# Altium PCB CHILD_BOARD_revA.PcbDoc (part 1 of 3)
Units mil, origin at the board's own origin, x right, y up, seen from the top; angles counter-clockwise.
Board outline 6000 x 4000 mil, 2 copper layers (Top Layer, Bottom Layer); 312 components, 224 nets, 1180 pads, 0 vias.
Unrouted connection lines stored in the file: 721.
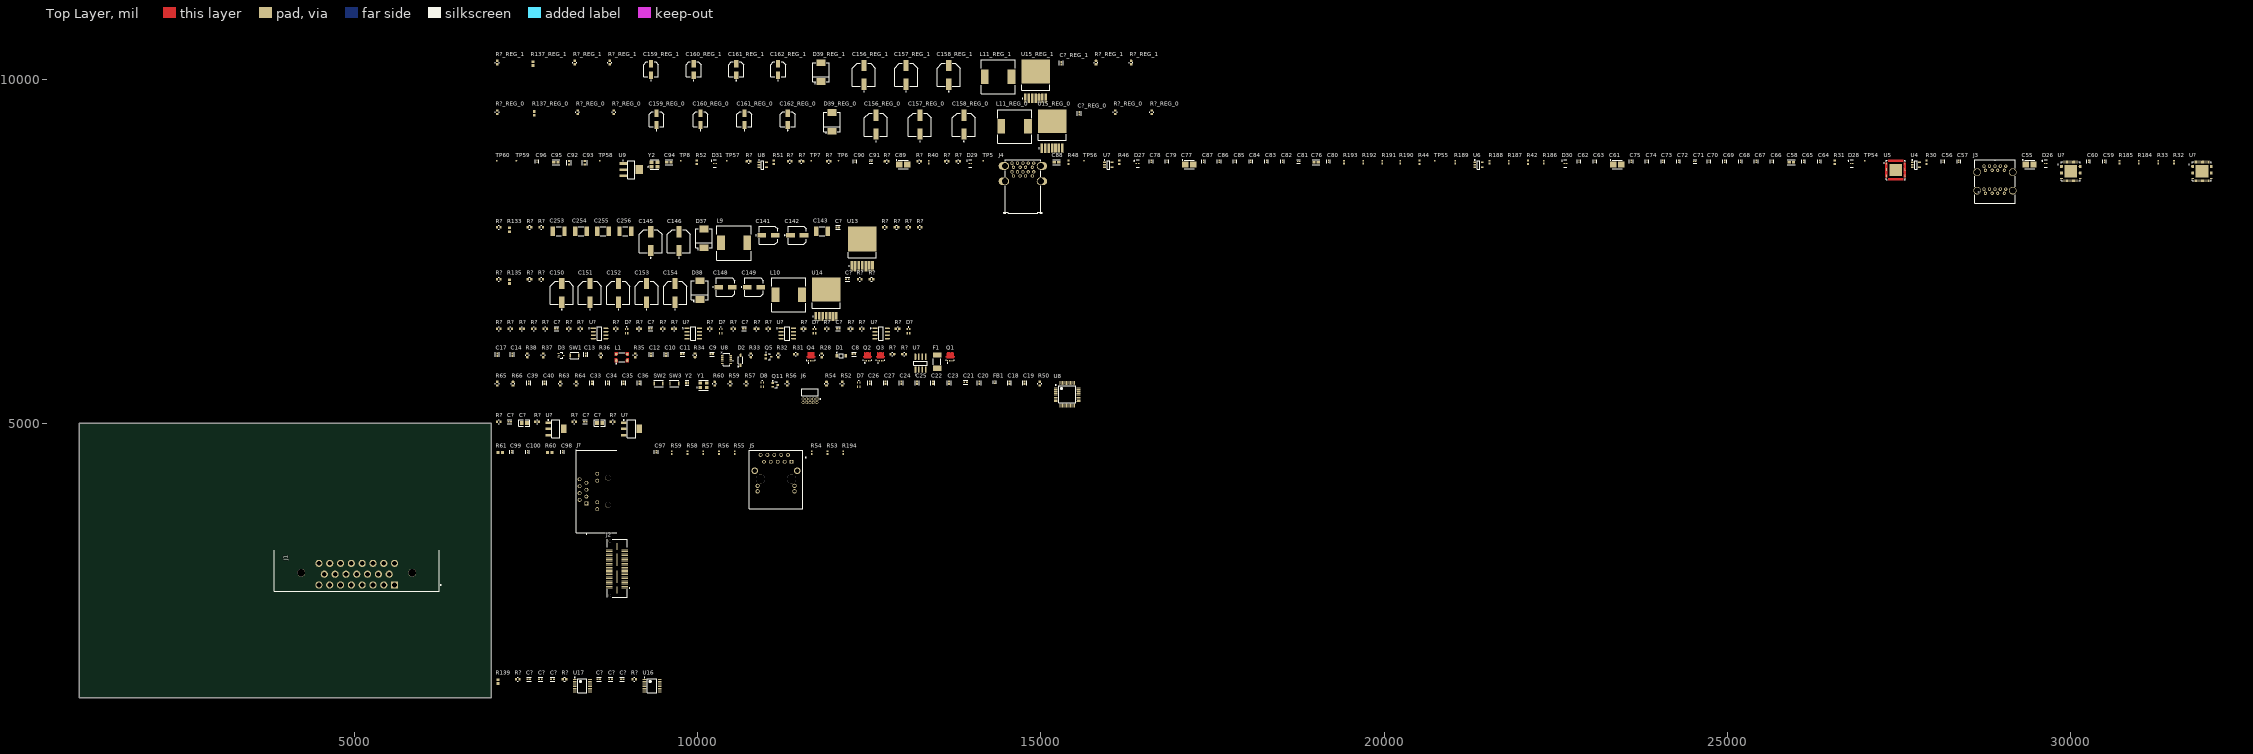
[diagram p0: Top Layer view]
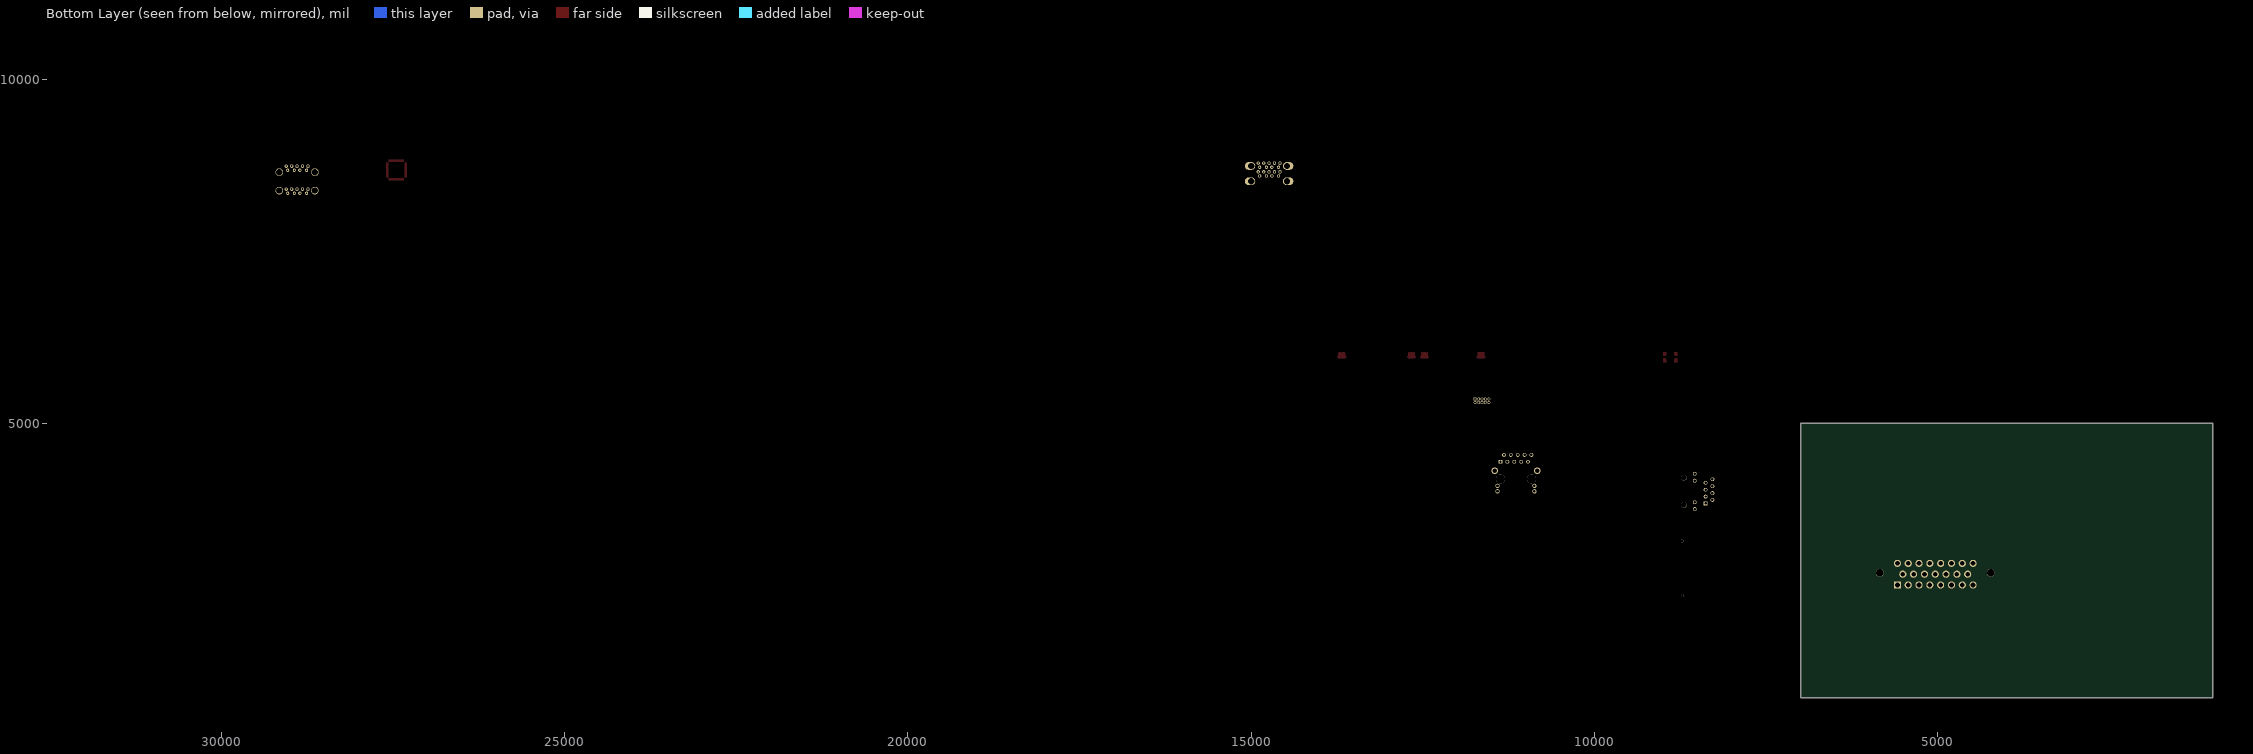
[diagram p1: Bottom Layer view, seen from below]

## Layer stack, top to bottom
Top Solder: solder mask 0.4, Solder Resist, Dk 3.5
Top Layer: signal copper 1.4
Dielectric 1: dielectric 12.6, FR-4, Dk 4.8
Bottom Layer: signal copper 1.4
Bottom Solder: solder mask 0.4, Solder Resist, Dk 3.5

## Board outline
1000,1000 7000,1000 7000,5000 1000,5000

## Design rules (kind name [scope] priority, off if disabled: settings)
Clearance [All] p1: gap=10 ignorepadtopadclearanceinfootprint=FALSE
DiffPairsRouting [All] p1: maxlimit=10 minlimit=10 mostfreqgap=10 toplayer_minwidth=15 toplayer_maxwidth=15 toplayer_prefwidth=15 bottomlayer_minwidth=15 bottomlayer_maxwidth=15 bottomlayer_prefwidth=15 maxuncoupledlength=500
PolygonConnect [All] p1: connectstyle=Relief reliefconductorwidth=10 reliefentries=4 polygonreliefangle="90 Angle" airgapwidth=10
RoutingVias [All] p1: holewidth=28 width=50 viastyle="Through Hole" minholewidth=28 minwidth=50 maxholewidth=28 maxwidth=50
SolderMaskExpansion [All] p1: expansion=4 istentingtop=FALSE
Width [All] p1: maxlimit=10 minlimit=10 preferedwidth=10
29 further rules are at their usual default settings.

## Classes and differential pairs
differential pair class 90DIFF: PRE_USB0_RX PRE_USB0_TX PRE_USB1_RX PRE_USB1_TX PRE_USB2_RX PRE_USB2_TX PRE_USB3_RX PRE_USB3_TX USB0_RX USB0_TX USB1_RX USB1_TX USB2_RX USB2_TX USB2UP USB3_RX USB3_TX USB3UP_RX USB3UP_TX USBH0_D USBH1_D USBH2_D USBH3_D
channel class 5V_REG: REG_0 REG_1
net class PWR: 2V_AUX_OUT 2V_AUX_VCC 3V3_AUX_FB 3V3_AUX_VCC 5V_MAIN_VCC 5V_REG_FB_REG_0 5V_REG_FB_REG_1 INT_VCC NetC?_2 NetC?_REG_0_2 NetC?_REG_1_2
net class 120DIFF: CAN_N CAN_P PRE_CAN_N PRE_CAN_P TERM_CAP
net class 100DIFF: GBE_MDI0_N GBE_MDI0_P GBE_MDI1_N GBE_MDI1_P GBE_MDI2_N GBE_MDI2_P GBE_MDI3_N GBE_MDI3_P
net class 90DIFF: PRE_USB0_RX_N PRE_USB0_RX_P PRE_USB0_TX_N PRE_USB0_TX_P PRE_USB1_RX_N PRE_USB1_RX_P PRE_USB1_TX_N PRE_USB1_TX_P PRE_USB2_RX_N PRE_USB2_RX_P PRE_USB2_TX_N PRE_USB2_TX_P PRE_USB3_RX_N PRE_USB3_RX_P PRE_USB3_TX_N PRE_USB3_TX_P USB0_RX_N USB0_RX_P USB0_TX_N USB0_TX_P USB1_RX_N USB1_RX_P USB1_TX_N USB1_TX_P USB2_RX_N USB2_RX_P USB2_TX_N USB2_TX_P USB2UP_N USB2UP_P USB3_RX_N USB3_RX_P USB3_TX_N USB3_TX_P USB3UP_RX_N USB3UP_RX_P USB3UP_TX_N USB3UP_TX_P USBH0_D_N USBH0_D_P USBH1_D_N USBH1_D_P USBH2_D_N USBH2_D_P USBH3_D_N USBH3_D_P
component class USB3_0: C55 C56 C57 C58 C59 C60 C61 C62 C63 C64 C65 C66 C67 C68 C69 C70 C71 C72 C73 C74 C75 C76 C77 C78 C79 C80 C81 C82 C83 C84 C85 C86 C87 C88 C89 C90 C91 C92 C93 C94 C95 C96 D26 D27 D28 D29 D30 D31 J3 J4 R30 R31 R32 R33 R40 R42 R44 R46 R48 R51 R52 R184 R185 R186 R187 R188 R189 R190 R191 R192 R193 R? TP5 TP6 TP7 TP8 TP54 TP55 TP56 TP57 TP58 TP59 TP60 U4 U5 U6 U7 U8 U9 U? Y2
component class REG_3: C141 C142 C143 C145 C146 C253 C254 C255 C256 C? D37 L9 R133 R? U13
component class REG_2: C148 C149 C150 C151 C152 C153 C154 C? D38 L10 R135 R? U14
component class REG_1: C156_REG_1 C157_REG_1 C158_REG_1 C159_REG_1 C160_REG_1 C161_REG_1 C162_REG_1 C?_REG_1 D39_REG_1 L11_REG_1 R137_REG_1 R?_REG_1 U15_REG_1
component class REG_0: C156_REG_0 C157_REG_0 C158_REG_0 C159_REG_0 C160_REG_0 C161_REG_0 C162_REG_0 C?_REG_0 D39_REG_0 L11_REG_0 R137_REG_0 R?_REG_0 U15_REG_0
component class PWR_MGMT: C8 C9 C10 C11 C12 C13 C14 C17 D1 D2 D3 F1 L1 Q1 Q2 Q3 Q4 Q5 R28 R31 R32 R33 R34 R35 R36 R37 R38 R? SW1 U7 U8
component class INT_REG_0: C? R? U?
component class MCU_0: C18 C19 C20 C21 C22 C23 C24 C25 C26 C27 C33 C34 C35 C36 C39 C40 D7 D8 FB1 J6 Q11 R50 R52 R54 R56 R57 R59 R60 R63 R64 R65 R66 SW2 SW3 U8 Y1 Y2
component class PWR_MGMT_0: C? D? R? U?
component class ETH_IF_0: C97 C98 C99 C100 J5 J? R53 R54 R55 R56 R57 R58 R59 R60 R61 R194
component class CHILD_BOARD: J1 J2
component class ADC_0: C? R139 R? U16 U17
differential pair X: +X_P -X_N
differential pair X32: +X32_P -X32_N
differential pair X25: +X25_P -X25_N
differential pair USBH3_D: +USBH3_D_P -USBH3_D_N
differential pair USBH2_D: +USBH2_D_P -USBH2_D_N
differential pair USBH1_D: +USBH1_D_P -USBH1_D_N
differential pair USBH0_D: +USBH0_D_P -USBH0_D_N
differential pair USB3UP_TX: +USB3UP_TX_P -USB3UP_TX_N
differential pair USB3UP_RX: +USB3UP_RX_P -USB3UP_RX_N
differential pair USB3_TX: +USB3_TX_P -USB3_TX_N
differential pair USB3_RX: +USB3_RX_P -USB3_RX_N
differential pair USB2UP: +USB2UP_P -USB2UP_N
differential pair USB2_TX: +USB2_TX_P -USB2_TX_N
differential pair USB2_RX: +USB2_RX_P -USB2_RX_N
differential pair USB1_TX: +USB1_TX_P -USB1_TX_N
differential pair USB1_RX: +USB1_RX_P -USB1_RX_N
differential pair USB0_TX: +USB0_TX_P -USB0_TX_N
differential pair USB0_RX: +USB0_RX_P -USB0_RX_N
differential pair PRE_USB3_TX: +PRE_USB3_TX_P -PRE_USB3_TX_N
differential pair PRE_USB3_RX: +PRE_USB3_RX_P -PRE_USB3_RX_N
differential pair PRE_USB2_TX: +PRE_USB2_TX_P -PRE_USB2_TX_N
differential pair PRE_USB2_RX: +PRE_USB2_RX_P -PRE_USB2_RX_N
differential pair PRE_USB1_TX: +PRE_USB1_TX_P -PRE_USB1_TX_N
differential pair PRE_USB1_RX: +PRE_USB1_RX_P -PRE_USB1_RX_N
differential pair PRE_USB0_TX: +PRE_USB0_TX_P -PRE_USB0_TX_N
differential pair PRE_USB0_RX: +PRE_USB0_RX_P -PRE_USB0_RX_N
differential pair PRE_CAN: +PRE_CAN_P -PRE_CAN_N
differential pair GBE_MDI3: +GBE_MDI3_P -GBE_MDI3_N
differential pair GBE_MDI2: +GBE_MDI2_P -GBE_MDI2_N
differential pair GBE_MDI1: +GBE_MDI1_P -GBE_MDI1_N
differential pair GBE_MDI0: +GBE_MDI0_P -GBE_MDI0_N

## Components (designator, comment, footprint, x,y, rotation, side; value= is the part's Value field where it differs from the comment)
C8 "100n" FP-0402-L_1_0_0_05-W_0_5-IPC_A 12280,6005 r0 top
C9 "100n" FP-0402-L_1_0_0_05-W_0_5-IPC_A 10210,6005 r0 top
C10 "100n" FP-0402-L_1_0_0_05-W_0_5-IPC_A 9545,5995 r90 top
C11 "100n" FP-0402-L_1_0_0_05-W_0_5-IPC_A 9780,6005 r0 top
C12 "6.6p" FP-0402-L_1_0_0_05-W_0_5-IPC_A 9325,5995 r90 top
C13 "100n" FP-0402-L_1_0_0_05-W_0_5-IPC_A 8375,5995 r90 top
C14 "6.6p" FP-0402-L_1_0_0_05-W_0_5-IPC_A 7305,5995 r90 top
C17 "100n" FP-0402-L_1_0_0_05-W_0_5-IPC_A 7085,5995 r90 top
C18 "4.7u" FP-0402-L_1_0_0_05-W_0_5-IPC_A 14545,5585 r90 top
C19 "100n" FP-0402-L_1_0_0_05-W_0_5-IPC_A 14765,5585 r90 top
C20 "100n" FP-0402-L_1_0_0_05-W_0_5-IPC_A 14105,5585 r90 top
C21 "100n" FP-0402-L_1_0_0_05-W_0_5-IPC_A 13905,5595 r0 top
C22 "1u" FP-0402-L_1_0_0_05-W_0_5-IPC_A 13430,5585 r90 top
C23 "100n" FP-0402-L_1_0_0_05-W_0_5-IPC_A 13665,5585 r90 top
C24 "1u" FP-0402-L_1_0_0_05-W_0_5-IPC_A 12970,5585 r90 top
C25 "100n" FP-0402-L_1_0_0_05-W_0_5-IPC_A 13200,5585 r90 top
C26 "1u" FP-0402-L_1_0_0_05-W_0_5-IPC_A 12510,5585 r90 top
C27 "100n" FP-0402-L_1_0_0_05-W_0_5-IPC_A 12740,5585 r90 top
C33 "6.8p" FP-0402-L_1_0_0_05-W_0_5-IPC_A 8465,5585 r90 top
C34 "6.8p" FP-0402-L_1_0_0_05-W_0_5-IPC_A 8695,5585 r90 top
C35 "18p" FP-0402-L_1_0_0_05-W_0_5-IPC_A 8925,5585 r90 top
C36 "18p" FP-0402-L_1_0_0_05-W_0_5-IPC_A 9155,5585 r90 top
C39 "100n" FP-0402-L_1_0_0_05-W_0_5-IPC_A 7545,5585 r90 top
C40 "100n" FP-0402-L_1_0_0_05-W_0_5-IPC_A 7775,5585 r90 top
C55 "T520B337M2R5ATE045" KEMT-520-B-2_M 29400,8765 r0 top
C56 "C1005X7R1H104K050BB" FP-C1005-050-0_05-IPC_C 28140,8810 r90 top
C57 "C1005X7R1H104K050BB" FP-C1005-050-0_05-IPC_C 28370,8810 r90 top
C58 "GRM188R60J106ME47D" FP-GRM188-0_1-e0_2_0_55-IPC_A 25930,8800 r0 top
C59 "C1005X7R1H104K050BB" FP-C1005-050-0_05-IPC_C 30490,8810 r90 top
C60 "C1005X7R1H104K050BB" FP-C1005-050-0_05-IPC_C 30260,8810 r90 top
C61 "T520B337M2R5ATE045" KEMT-520-B-2_M 23395,8765 r0 top
C62 "C1005X7R1H104K050BB" FP-C1005-050-0_05-IPC_C 22840,8810 r90 top
C63 "C1005X7R1H104K050BB" FP-C1005-050-0_05-IPC_C 23070,8810 r90 top
C64 "C1005X7R1H104K050BB" FP-C1005-050-0_05-IPC_C 26340,8810 r90 top
C65 "C1005X7R1H104K050BB" FP-C1005-050-0_05-IPC_C 26110,8810 r90 top
C66 "C1005X7R1H104K050BB" FP-C1005-050-0_05-IPC_C 25650,8810 r90 top
C67 "C1005X7R1H104K050BB" FP-C1005-050-0_05-IPC_C 25420,8810 r90 top
C68 "C1005X7R1H104K050BB" FP-C1005-050-0_05-IPC_C 25190,8810 r90 top
C69 "C1005X7R1H104K050BB" FP-C1005-050-0_05-IPC_C 24960,8810 r90 top
C70 "C1005X7R1H104K050BB" FP-C1005-050-0_05-IPC_C 24730,8810 r90 top
C71 "C1005X7R1H104K050BB" FP-C1005-050-0_05-IPC_C 24525,8810 r0 top
C72 "C1005X7R1H104K050BB" FP-C1005-050-0_05-IPC_C 24290,8810 r90 top
C73 "C1005X7R1H104K050BB" FP-C1005-050-0_05-IPC_C 24060,8810 r90 top
C74 "C1005X7R1H104K050BB" FP-C1005-050-0_05-IPC_C 23830,8810 r90 top
C75 "C1005X7R1H104K050BB" FP-C1005-050-0_05-IPC_C 23600,8810 r90 top
C76 "GRM188R60J106ME47D" FP-GRM188-0_1-e0_2_0_55-IPC_A 19010,8800 r0 top
C77 "T520B337M2R5ATE045" KEMT-520-B-2_M 17165,8765 r0 top
C78 "C1005X7R1H104K050BB" FP-C1005-050-0_05-IPC_C 16610,8810 r90 top
C79 "C1005X7R1H104K050BB" FP-C1005-050-0_05-IPC_C 16840,8810 r90 top
C80 "C1005X7R1H104K050BB" FP-C1005-050-0_05-IPC_C 19190,8810 r90 top
C81 "C1005X7R1H104K050BB" FP-C1005-050-0_05-IPC_C 18755,8810 r0 top
C82 "C1005X7R1H104K050BB" FP-C1005-050-0_05-IPC_C 18520,8810 r90 top
C83 "C1005X7R1H104K050BB" FP-C1005-050-0_05-IPC_C 18290,8810 r90 top
C84 "C1005X7R1H104K050BB" FP-C1005-050-0_05-IPC_C 18060,8810 r90 top
C85 "C1005X7R1H104K050BB" FP-C1005-050-0_05-IPC_C 17830,8810 r90 top
C86 "C1005X7R1H104K050BB" FP-C1005-050-0_05-IPC_C 17600,8810 r90 top
C87 "C1005X7R1H104K050BB" FP-C1005-050-0_05-IPC_C 17370,8810 r90 top
C88 "GRM188R60J106ME47D" FP-GRM188-0_1-e0_2_0_55-IPC_A 15230,8800 r0 top
C89 "T520B337M2R5ATE045" KEMT-520-B-2_M 13000,8765 r0 top
C90 "C1005X7R1H104K050BB" FP-C1005-050-0_05-IPC_C 12295,8810 r90 top
C91 "C1005X7R1H104K050BB" FP-C1005-050-0_05-IPC_C 12525,8810 r0 top
C92 "C0603C300J5GACTU" FP-C0603C-CF-MFG 8130,8790 r90 top value="30 pF"
C93 "C0603C300J5GACTU" FP-C0603C-CF-MFG 8360,8790 r90 top value="30 pF"
C94 "GRM188R60J106ME47D" FP-GRM188-0_1-e0_2_0_55-IPC_A 9585,8800 r0 top
C95 "GRM188R60J106ME47D" FP-GRM188-0_1-e0_2_0_55-IPC_A 7940,8800 r0 top
C96 "C1005X7R1H104K050BB" FP-C1005-050-0_05-IPC_C 7665,8810 r90 top
C97 "C1005X7R1H104K050BB" FP-C1005-050-0_05-IPC_C 9400,4580 r90 top
C98 "C1005X7R1H104K050BB" FP-C1005-050-0_05-IPC_C 8035,4580 r90 top
C99 "C1005X7R1H104K050BB" FP-C1005-050-0_05-IPC_C 7295,4580 r90 top
C100 "C1005X7R1H104K050BB" FP-C1005-050-0_05-IPC_C 7525,4580 r90 top
C141 "EEHZA1V680XP" FP-EEH-D8-MFG 11035,7735 r0 top
C142 "EEHZA1V680XP" FP-EEH-D8-MFG 11455,7735 r0 top
C143 "CAP 470nF 50V 1812(4532)" CAPC1812(4532)125_M 11815,7795 r0 top value=470nF
C145 "16SVPC120M" FP-OS-CON-SMT-E7-MFG 9320,7650 r90 top
C146 "16SVPC120M" FP-OS-CON-SMT-E7-MFG 9730,7650 r90 top
C148 "EEHZA1V680XP" FP-EEH-D8-MFG 10410,6980 r0 top
C149 "EEHZA1V680XP" FP-EEH-D8-MFG 10825,6980 r0 top
C150 "16SVPC120M" FP-OS-CON-SMT-E7-MFG 8025,6895 r90 top
C151 "16SVPC120M" FP-OS-CON-SMT-E7-MFG 8435,6895 r90 top
C152 "16SVPC120M" FP-OS-CON-SMT-E7-MFG 8850,6895 r90 top
C153 "16SVPC120M" FP-OS-CON-SMT-E7-MFG 9260,6895 r90 top
C154 "16SVPC120M" FP-OS-CON-SMT-E7-MFG 9675,6895 r90 top
C156_REG_0 "20SVP33M" FP-OS-CON-SMT-E7-MFG 12600,9345 r90 top (schematic designator C156)
C156_REG_1 "20SVP33M" FP-OS-CON-SMT-E7-MFG 12425,10070 r90 top (schematic designator C156)
C157_REG_0 "20SVP33M" FP-OS-CON-SMT-E7-MFG 13240,9345 r90 top (schematic designator C157)
C157_REG_1 "20SVP33M" FP-OS-CON-SMT-E7-MFG 13040,10070 r90 top (schematic designator C157)
C158_REG_0 "20SVP33M" FP-OS-CON-SMT-E7-MFG 13880,9345 r90 top (schematic designator C158)
C158_REG_1 "20SVP33M" FP-OS-CON-SMT-E7-MFG 13660,10070 r90 top (schematic designator C158)
C159_REG_0 "EEE-1AA101WR" FP-SC-MFG 9405,9425 r90 top (schematic designator C159)
C159_REG_1 "EEE-1AA101WR" FP-SC-MFG 9325,10150 r90 top (schematic designator C159)
C160_REG_0 "EEE-1AA101WR" FP-SC-MFG 10045,9425 r90 top (schematic designator C160)
C160_REG_1 "EEE-1AA101WR" FP-SC-MFG 9945,10150 r90 top (schematic designator C160)
C161_REG_0 "EEE-1AA101WR" FP-SC-MFG 10685,9425 r90 top (schematic designator C161)
C161_REG_1 "EEE-1AA101WR" FP-SC-MFG 10565,10150 r90 top (schematic designator C161)
C162_REG_0 "EEE-1AA101WR" FP-SC-MFG 11315,9425 r90 top (schematic designator C162)
C162_REG_1 "EEE-1AA101WR" FP-SC-MFG 11175,10150 r90 top (schematic designator C162)
C253 "CAP 470nF 50V 1812(4532)" CAPC1812(4532)125_M 7980,7795 r0 top value=470nF
C254 "CAP 470nF 50V 1812(4532)" CAPC1812(4532)125_M 8305,7795 r0 top value=470nF
C255 "CAP 470nF 50V 1812(4532)" CAPC1812(4532)125_M 8625,7795 r0 top value=470nF
C256 "CAP 470nF 50V 1812(4532)" CAPC1812(4532)125_M 8950,7795 r0 top value=470nF
C? "100n" FP-0402-L_1_0_0_05-W_0_5-IPC_A 7545,1270 r0 top
C? "100n" FP-0402-L_1_0_0_05-W_0_5-IPC_A 8565,1270 r0 top
C? "100n" FP-0402-L_1_0_0_05-W_0_5-IPC_A 8365,5020 r0 top
C? "100n" FP-0402-L_1_0_0_05-W_0_5-IPC_A 8905,1270 r0 top
C? "100n" FP-0402-L_1_0_0_05-W_0_5-IPC_A 7715,1270 r0 top
C? "10n" FP-0402-L_1_0_0_05-W_0_5-IPC_A 12185,7095 r0 top
C? "100n" FP-0402-L_1_0_0_05-W_0_5-IPC_A 7890,1270 r0 top
C? "100n" FP-0402-L_1_0_0_05-W_0_5-IPC_A 8735,1270 r0 top
C? "100n" FP-0402-L_1_0_0_05-W_0_5-IPC_A 7265,5020 r0 top
C? "100n" FP-0402-L_1_0_0_05-W_0_5-IPC_A 7945,6375 r0 top
C? "100n" FP-0402-L_1_0_0_05-W_0_5-IPC_A 10680,6375 r0 top
C? "10n" FP-0402-L_1_0_0_05-W_0_5-IPC_A 12045,7850 r0 top
C? "100n" FP-0402-L_1_0_0_05-W_0_5-IPC_A 12050,6375 r0 top
C? "10u/DNO" C0805A 7480,5000 r0 top
C? "10u/DNO" C0805A 8575,5000 r0 top
C? "100n" FP-0402-L_1_0_0_05-W_0_5-IPC_A 9315,6375 r0 top
C?_REG_0 "10n" FP-0402-L_1_0_0_05-W_0_5-IPC_A 15560,9510 r90 top (schematic designator C?)
C?_REG_1 "10n" FP-0402-L_1_0_0_05-W_0_5-IPC_A 15300,10240 r90 top (schematic designator C?)
D1 "MMSZ5242BT1G" ONSC-SOD-123-2-425-04_V 12095,5980 r0 top
D2 "1N4148W-TP" FP-SOD-123-IPC_A 10630,5915 r90 top
D3 "ESDCAN02-2BWY" FP-SOT323-3L-MFG 8015,5985 r0 top value=3pF
D7 "150066RG54050" WL-SBCD_0606 12350,5560 r0 top
D8 "150066RG54050" WL-SBCD_0606 10945,5560 r0 top
D26 "ESD204DQAR or PUSB3AB4Z" FP-DQA0010A-MFG 29635,8780 r0 top value=0.55pF
D27 "ESD204DQAR or PUSB3AB4Z" FP-DQA0010A-MFG 16410,8780 r0 top value=0.55pF
D28 "ESD204DQAR or PUSB3AB4Z" FP-DQA0010A-MFG 26810,8780 r0 top value=0.55pF
D29 "ESD204DQAR or PUSB3AB4Z" FP-DQA0010A-MFG 13975,8780 r0 top value=0.55pF
D30 "ESD204DQAR or PUSB3AB4Z" FP-DQA0010A-MFG 22640,8780 r0 top value=0.55pF
D31 "ESD204DQAR or PUSB3AB4Z" FP-DQA0010A-MFG 10255,8780 r0 top value=0.55pF
D37 "B540C-13-F" FP-SMC-MFG 10095,7690 r90 top value=300pF
D38 "B540C-13-F" FP-SMC-MFG 10035,6935 r90 top value=300pF
D39_REG_0 "B540C-13-F" FP-SMC-MFG 11960,9385 r90 top value=300pF (schematic designator D39)
D39_REG_1 "B540C-13-F" FP-SMC-MFG 11800,10110 r90 top value=300pF (schematic designator D39)
D? "150066RG54050" WL-SBCD_0606 11705,6340 r0 top
D? "150066RG54050" WL-SBCD_0606 8970,6340 r0 top
D? "150066RG54050" WL-SBCD_0606 10340,6340 r0 top
D? "150066RG54050" WL-SBCD_0606 13075,6340 r0 top
F1 "0679L9100-05" FP-0679L-MFG 13490,5895 r90 top value=0.0038Ω
FB1 "BLM15PX601SN1D" FP-BLM15-0_05-MFG 14330,5595 r90 top
J1 "776087-1" FP-776087-1-MFG 5039.37,3307.09 r180 top
J2 "QSH-030-01-F-D-A-K-TR" FP-QSH-030-01-F-D-A-K-TR-MFG 8830,2885 r90 top
J3 "48409-0003" 48409-0003-Footprint-1 28905,8520 r0 top
J4 "692141030100" 692141030100 14740,8445 r0 top
J5 "ARJM11C7-502-AB-ER2-T" FP-ARJM11C7-502-AB-ER2-T-MFG 11145,4180 r0 top
J6 "FTSH-105-01-F-D-RA-K" FTSH-105-01-F-D-RA-K-Footprint-1 11640,5350 r0 top
J? "MRJ-5381-01" FP-MRJ-5381-01-MFG 8775,4005 r90 top
L1 "SRF4532-510Y" FP-SRF4532-MFG 8900,5960 r0 top
L9 "SRR1260-150M" FP-SRR1260-MFG 10535,7625 r0 top
L10 "74477110" WE-PD-L 11330,6870 r0 top
L11_REG_0 "74477110" WE-PD-L 14620,9320 r0 top (schematic designator L11)
L11_REG_1 "74477110" WE-PD-L 14380,10045 r0 top (schematic designator L11)
Q1 "SISH615ADN-T1-GE3" SISH615ADN-T1-GE3-Footprint-1 13680,5965 r0 top
Q2 "SISH615ADN-T1-GE3" SISH615ADN-T1-GE3-Footprint-1 12475,5965 r0 top
Q3 "SISH615ADN-T1-GE3" SISH615ADN-T1-GE3-Footprint-1 12665,5965 r0 top
Q4 "SISH615ADN-T1-GE3" SISH615ADN-T1-GE3-Footprint-1 11655,5965 r0 top
Q5 "BSS138W-7-F" DIOD-SOT323-3_V 11035,5965 r0 top
Q11 "DMG1013UW-7" DIOD-SOT323-3_V 11135,5555 r0 top
R28 "100k" R0603B 11810,5985 r90 top
R30 "ERJ-3EKF1001V" RESC1608X55X30LL15T15 27900,8800 r90 top
R31 "100k" R0603B 11430,6005 r0 top
R31 "ERJ3EKF1002V" RESC1609X55X30LL15T15 26565,8795 r90 top
R32 "1k" R0603B 11180,5985 r90 top
R32 "0402 JUMPER" RESC1005X40X25ML05T05 31505,8800 r90 top
R33 "100k" R0603B 10780,5985 r90 top
R33 "0402 JUMPER" RESC1005X40X25ML05T05 31275,8800 r90 top
R34 "100k" R0603B 9965,5985 r90 top
R35 "1k" R0603B 9095,5985 r90 top
R36 "60.4" R0603B 8595,5985 r90 top
R37 "120" R0603B 7755,5985 r90 top
R38 "60.4" R0603B 7525,5985 r90 top
R40 "0402 JUMPER" RESC1005X40X25ML05T05 13370,8800 r90 top
R42 "ERJ-3EKF1001V" RESC1608X55X30LL15T15 22095,8800 r90 top
R44 "ERJ3EKF1002V" RESC1609X55X30LL15T15 20515,8795 r90 top
R46 "ERJ-3EKF1001V" RESC1608X55X30LL15T15 16145,8800 r90 top
R48 "ERJ3EKF1002V" RESC1609X55X30LL15T15 15405,8795 r90 top
R50 "10k" R0603B 14985,5575 r90 top
R51 "ERJ-3EKF1001V" RESC1608X55X30LL15T15 11110,8800 r90 top
R52 "330" R0603B 12110,5575 r90 top
R52 "ERJ3EKF1002V" RESC1609X55X30LL15T15 9990,8795 r90 top
R53 "0402 JUMPER" RESC1005X40X25ML05T05 11895,4570 r90 top
R54 "0402 JUMPER" RESC1005X40X25ML05T05 11665,4570 r90 top
R54 "1k" R0603B 11880,5575 r90 top
R55 "0402 JUMPER" RESC1005X40X25ML05T05 10545,4570 r90 top
R56 "0402 JUMPER" RESC1005X40X25ML05T05 10315,4570 r90 top
R56 "1k" R0603B 11310,5575 r90 top
R57 "0402 JUMPER" RESC1005X40X25ML05T05 10085,4570 r90 top
R57 "100k" R0603B 10710,5575 r90 top
R58 "0402 JUMPER" RESC1005X40X25ML05T05 9855,4570 r90 top
R59 "0402 JUMPER" RESC1005X40X25ML05T05 9625,4570 r90 top
R59 "330" R0603B 10480,5575 r90 top
R60 "ERJ-3EKF1200V" RESC1609X55X30ML15T15 7850,4570 r0 top
R60 "330" R0603B 10250,5575 r90 top
R61 "ERJ-3EKF1200V" RESC1609X55X30ML15T15 7130,4570 r0 top
R63 "330" R0603B 8005,5575 r90 top
R64 "330" R0603B 8235,5575 r90 top
R65 "10k" R0603B 7085,5575 r90 top
R66 "10k" R0603B 7315,5575 r90 top
R133 "ERT-J1VR103J" RESC1608X90X30ML15T20 7265,7815 r90 top
R135 "ERT-J1VR103J" RESC1608X90X30ML15T20 7265,7060 r90 top
R137_REG_0 "ERT-J1VR103J" RESC1608X90X30ML15T20 7625,9510 r90 top (schematic designator R137)
R137_REG_1 "ERT-J1VR103J" RESC1608X90X30ML15T20 7605,10235 r90 top (schematic designator R137)
R139 "ERT-J1VR103J" RESC1608X90X30ML15T20 7095,1235 r90 top
R184 "0402 JUMPER" RESC1005X40X25ML05T05 30990,8800 r90 top
R185 "0402 JUMPER" RESC1005X40X25ML05T05 30710,8800 r90 top
R186 "0402 JUMPER" RESC1005X40X25ML05T05 22325,8800 r90 top
R187 "0402 JUMPER" RESC1005X40X25ML05T05 21815,8800 r90 top
R188 "0402 JUMPER" RESC1005X40X25ML05T05 21535,8800 r90 top
R189 "0402 JUMPER" RESC1005X40X25ML05T05 21035,8800 r90 top
R190 "0402 JUMPER" RESC1005X40X25ML05T05 20235,8800 r90 top
R191 "0402 JUMPER" RESC1005X40X25ML05T05 19975,8800 r90 top
R192 "0402 JUMPER" RESC1005X40X25ML05T05 19695,8800 r90 top
R193 "0402 JUMPER" RESC1005X40X25ML05T05 19415,8800 r90 top
R194 "0402 JUMPER" RESC1005X40X25ML05T05 12125,4570 r90 top
R? "100k" R0603B 8810,6375 r0 top
R? "1k" R0603B 11030,6375 r0 top
R? "1k" R0603B 9660,6375 r0 top
R? "100k" R0603B 8765,5020 r0 top
R? "100k" R0603B 7105,5020 r0 top
R? "10k" R0603B 7665,5020 r0 top
R? "100k" R0603B 8205,5020 r0 top
R? "1k" R0603B 12395,6375 r0 top
R? "330" R0603B 9150,6375 r0 top
R? "1k" R0603B 9495,6375 r0 top
R? "24k" R0603B 7275,6375 r0 top
R? "1k" R0603B 8295,6375 r0 top
R? "1k" R0603B 8125,6375 r0 top
R? "100k" R0603B 12915,6375 r0 top
R? "56" R0603B 8065,1270 r0 top
R? "1k" R0603B 13240,7850 r0 top
R? "100k/DNP" R0603B 13070,7850 r0 top value=100k
R? "10k" R0603B 7105,7850 r0 top
R? "1k" R0603B 7555,7850 r0 top
R? "1k" R0603B 7725,7850 r0 top
R? "100k" R0603B 12730,7850 r0 top
R? "68.1k" R0603B 12900,7850 r0 top
R? "100k" R0603B 12365,7095 r0 top
R? "1k" R0603B 7385,1270 r0 top
R? "56" R0603B 9080,1270 r0 top
R? "10k" R0603B 7105,7095 r0 top
R? "1k" R0603B 7555,7095 r0 top
R? "10k" R0603B 12535,7095 r0 top
R? "1k" R0603B 7725,7095 r0 top
R? "100k" R0603B 11545,6375 r0 top
R? "12k" R0603B 11515,8810 r0 top
R? "10k" R0603B 11915,8810 r0 top
R? "100k" R0603B 12840,6005 r0 top
R? "200k" R0603B 13800,8810 r0 top
R? "10k" R0603B 10745,8810 r0 top
R? "10k" R0603B 12755,8810 r0 top
R? "200k" R0603B 11345,8810 r0 top
R? "10k" R0603B 13630,8810 r0 top
R? "10k" R0603B 13230,8810 r0 top
R? "1k" R0603B 13010,6005 r0 top
R? "100k" R0603B 10180,6375 r0 top
R? "330" R0603B 11885,6375 r0 top
R? "1k" R0603B 12230,6375 r0 top
R? "330" R0603B 7785,6375 r0 top
R? "24k" R0603B 7105,6375 r0 top
R? "330" R0603B 10520,6375 r0 top
R? "100k" R0603B 7445,6375 r0 top
R? "100k" R0603B 7615,6375 r0 top
R? "1k" R0603B 10860,6375 r0 top
R?_REG_0 "1k" R0603B 8785,9525 r90 top (schematic designator R?)
R?_REG_0 "1k" R0603B 8255,9525 r90 top (schematic designator R?)
R?_REG_0 "100k" R0603B 16615,9525 r90 top (schematic designator R?)
R?_REG_0 "100k" R0603B 16085,9525 r90 top (schematic designator R?)
R?_REG_0 "10k" R0603B 7085,9525 r90 top (schematic designator R?)
R?_REG_1 "1k" R0603B 8215,10250 r90 top (schematic designator R?)
R?_REG_1 "100k" R0603B 15805,10250 r90 top (schematic designator R?)
R?_REG_1 "100k" R0603B 16315,10250 r90 top (schematic designator R?)
R?_REG_1 "1k" R0603B 8725,10250 r90 top (schematic designator R?)
R?_REG_1 "10k" R0603B 7085,10250 r90 top (schematic designator R?)
SW1 "KXT331LHS" FP-KXT331LHS-MFG 8210,5985 r0 top
SW2 "KXT331LHS" FP-KXT331LHS-MFG 9435,5575 r0 top
SW3 "KXT331LHS" FP-KXT331LHS-MFG 9665,5575 r0 top
TP5 "TPAD6R" "New footprint 1" 14165,8820 r90 top
TP6 "TPAD6R" "New footprint 1" 12055,8820 r90 top
TP7 "TPAD6R" "New footprint 1" 11655,8820 r90 top
TP8 "TPAD6R" "New footprint 1" 9755,8820 r90 top
TP54 "TPAD6R" "New footprint 1" 27000,8820 r90 top
TP55 "TPAD6R" "New footprint 1" 20740,8820 r90 top
TP56 "TPAD6R" "New footprint 1" 15630,8820 r90 top
TP57 "TPAD6R" "New footprint 1" 10425,8820 r90 top
TP58 "TPAD6R" "New footprint 1" 8575,8820 r90 top
TP59 "TPAD6R" "New footprint 1" 7365,8820 r90 top
TP60 "TPAD6R" "New footprint 1" 7075,8820 r90 top
U4 "AP2171WG-7" SOT95P285X130-5N 27745,8760 r0 top
U5 "USB5744/2G" FP-USB5744-2G-MFG 27450,8685 r0 top
U6 "AP2171WG-7" SOT95P285X130-5N 21375,8760 r0 top
U7 "ACS711KLCTR-25AB-T" FP-LC-8-IPC_A 13250,5870 r90 top
U7 "AP2171WG-7" SOT95P285X130-5N 15985,8760 r0 top
U8 "STM32G473CET6" TSQFP50P900X900X160-48N 15385,5420 r0 top
U8 "TCAN1146DYYRQ1" TCAN1146DYYRQ1-Footprint-1 10425,5925 r0 top
U8 "AP2171WG-7" SOT95P285X130-5N 10950,8760 r0 top
U9 "AP7363-12E-13" SOT-223_M 9035,8690 r0 top
U13 "LM2677S-ADJ" KTW0007B_M 12400,7535 r90 top
U14 "LM2678S-3.3/NOPB" KTW0007B_N 11875,6800 r90 top
U15_REG_0 "LM2678S-5.0" KTW0007B_N 15165,9250 r90 top (schematic designator U15)
U15_REG_1 "LM2678S-5.0" KTW0007B_N 14925,9975 r90 top (schematic designator U15)
U16 "ADC088S022CIMT/NOPB" MTC16_L 9340,1175 r0 top
U17 "ADC088S022CIMT/NOPB" MTC16_L 8325,1175 r0 top
U? "ACS711KLCTR-12AB-T" FP-LC-8-IPC_C 9940,6305 r0 top
U? "ACS711KLCTR-12AB-T" FP-LC-8-IPC_C 11310,6305 r0 top
U? "LD1117S50TR" SOT-223_L 9040,4915 r0 top
U? "LD1117S33TR" SOT-223_L 7940,4915 r0 top
U? "USB5744/2G" FP-USB5744-2G-IPC_A 30000,8665 r0 top
U? "USB5744/2G" FP-USB5744-2G-IPC_A 31910,8665 r0 top
U? "ACS711KLCTR-12AB-T" FP-LC-8-IPC_C 12675,6305 r0 top
U? "ACS711KLCTR-12AB-T" FP-LC-8-IPC_C 8575,6305 r0 top
Y1 "ABM8-48.000MHZ-B2-T" FP-ABM8-MFG 10090,5550 r0 top
Y2 "ECS-.327-12.5-1210-TR" FP-ECX-1210-MFG 9850,5585 r0 top
Y2 "ABM8G-25.000MHZ-18-D2Y-T" FP-ABM8G-MFG 9375,8765 r0 top

## Footprints (in the part's own frame and the unit in brackets; to place one, negate y for a bottom-side part, rotate by r counter-clockwise, add the part's x,y. Pads: shape width x height; smd on the part's side, far side on the other; paste and mask are expansions set on the pad)
48409-0003-Footprint-1 [mil]
  round 48 / inner round 60 / far side round 48 hole 28 paste-99999 mask-24: 1(-147.64,-173.23) 2(-49.21,-173.23) 3(29.53,-173.23) 4(127.95,-173.23) 5(147.64,-114.17) 6(68.9,-114.17) 7(-9.84,-114.17) 8(-88.58,-114.17) 9(-167.32,-114.17) 10(-147.64,161.81) 11(-49.21,161.81) 12(29.53,161.81) 13(127.96,161.81) 14(147.64,220.87) 15(68.9,220.87) 16(-9.84,220.87) 17(-88.58,220.87) 18(-167.32,220.87)
  round 111 / inner round 60 / far side round 111 hole 91 paste-99999 mask-55.5: 19(-268.5,133.07) 20(248.82,133.07) 21(-268.5,-134.65) 22(248.82,-134.65)
  silkscreen extent -305,-318 286,317, body extent -316,-307 298,307, height 593
692141030100 [mm] "USB 3.0 Type A Stacked"
  round 1.2 hole 0.7: A1(-3.5,3.93) A2(-1,3.93) A3(1,3.93) A4(3.5,3.93) A5(4,5.43) A6(2,5.43) A7(0,5.43) A8(-2,5.43) A9(-4,5.43) B1(-3.5,7.13) B2(-1,7.13) B3(1,7.13) B4(3.5,7.13) B5(4,8.63) B6(2,8.63) B7(0,8.63) B8(-2,8.63) B9(-4,8.63)
  oval 3.85x2.9 hole 2.3 copper offset -0.475,0: Shell(-6.57,1.93) Shell(-6.57,7.61)
  oval 3.85x2.9 hole 2.3 copper offset 0.475,0: Shell(6.57,1.93) Shell(6.57,7.61)
  silkscreen extent -7.15,-9.85 7.15,9.85, body extent -7.79,-9.85 7.79,9.85, height 16.16
C0805A [mm] "0805 Capacitor"
  rect 1.4x1.55 smd: 1(-0.975,0) 2(0.975,0)
  silkscreen extent -2.03,-1.14 2.03,1.14, body extent -1.07,-0.7 1.07,0.7, height 0.65
CAPC1812(4532)125_M [mm] "Chip Capacitor, Body 4.5x3.2mm, Height 1.25mm, IPC Low Density"
  rect 1.6x3.5 smd: 1(-2.15,0) 2(2.15,0)
  silkscreen extent -0.95,-1.65 0.95,1.65, body extent -2.4,-1.7 2.4,1.7, height 1.25
DIOD-SOT323-3_V [mm] "SOT323, 3-Leads, Body 2.2x1.35mm, Pitch 0.65mm"
  rect 0.9x0.7 smd: 1(-0.95,0.65) 2(-0.95,-0.65) 3(0.95,0)
  silkscreen extent -1.07,-1.1 0.67,1.67, body extent -1.1,-1.1 1.1,1.1, height 1.07
FP-0402-L_1_0_0_05-W_0_5-IPC_A [mil]
  rect 28.16x26.48 smd paste+0 mask+0: 1(-18.84,0) 2(18.84,0)
  silkscreen extent -33,-29 33,29, body extent -41,-21 41,21, height 10
FP-0679L-MFG [mm]
  rect 1.96x3.15 smd paste+0 mask+0: 1(-2.455,0) 2(2.455,0)
  silkscreen extent -1.1,-1.4 1.1,1.4, body extent -3.53,-1.68 3.53,1.68, height 0.25
FP-776087-1-MFG [mm]
  rect 2.65x2.65 hole 1.75 paste-2539.97 mask+0: 1(-14,16.9)
  round 2.65 hole 1.75 paste-2539.97 mask+0: 2(-10,16.9) 3(-6,16.9) 4(-2,16.9) 5(2,16.9) 6(6,16.9) 7(10,16.9) 8(14,16.9) 9(-12,12.9) 10(-8,12.9) 11(-4,12.9) 12(0,12.9) 13(4,12.9) 14(8,12.9) 15(12,12.9) 16(-14,8.9) 17(-10,8.9) 18(-6,8.9) 19(-2,8.9) 20(2,8.9) 21(6,8.9) 22(10,8.9) 23(14,8.9)
  round 2.85 hole 2.85 unplated paste-2539.97 mask+0: ""(-20.5,12.4) ""(20.5,12.4)
  silkscreen extent -31.22,4 30.5,19.15, body extent -30.6,-19.25 30.6,19.25, height 0.25
FP-ABM8-MFG [mm]
  rect 1.3x1.05 smd paste+0 mask+0: 1(-1.15,-0.875) 2(1.15,-0.875) 3(1.15,0.875) 4(-1.15,0.875)
  silkscreen extent -2.5,-1.88 1.7,1.88, body extent -1.9,-1.5 1.9,1.5, height 0.25
FP-ABM8G-MFG [mm]
  rect 1.4x1.2 smd paste+0 mask+0: 1(-1.1,-0.85) 2(1.1,-0.85) 3(1.1,0.85) 4(-1.1,0.85)
  silkscreen extent -2.47,-1.83 1.6,1.83, body extent -1.9,-1.55 1.9,1.55, height 0.25
FP-ARJM11C7-502-AB-ER2-T-MFG [mm]
  rect 1.39x1.39 hole 0.89 paste-2539.97 mask+0: 1(5.715,6.5)
  round 1.39 hole 0.89 paste-2539.97 mask+0: 2(4.445,9.04) 3(3.175,6.5) 4(1.905,9.04) 5(0.635,6.5) 6(-0.635,9.04) 7(-1.905,6.5) 8(-3.175,9.04) 9(-4.445,6.5) 10(-5.715,9.04)
  round 2.42 hole 1.57 paste-2539.97 mask+0: 11(-7.875,3.2) 12(7.875,3.2)
  round 1.57 hole 1.02 paste-2539.97 mask+0: L1(-6.8,-2.4) L2(-6.8,-4.43) L3(6.8,-2.4) L4(6.8,-4.43)
  round 3.25 hole 3.25 unplated paste-2539.97 mask+0: ""(-5.715,0.15) ""(5.715,0.15)
  silkscreen extent -9.82,-10.78 11.15,10.78, body extent -9.92,-10.87 9.92,10.87, height 0.25
FP-BLM15-0_05-MFG [mm]
  rect 0.4x0.5 smd paste+0 mask+0: 1(-0.4,0) 2(0.4,0)
  silkscreen extent -0.53,-0.63 0.52,0.63, body extent -0.7,-0.38 0.7,0.38, height 0.25
FP-C0603C-CF-MFG [mm]
  rect 0.75x0.9 smd paste+0 mask+0: 1(-0.6,0) 2(0.6,0)
  silkscreen extent -0.87,-0.85 0.88,0.85, body extent -1.2,-0.6 1.2,0.6, height 0.25
FP-C1005-050-0_05-IPC_C [mil]
  rect 21.23x18.6 smd paste+0 mask+0: 1(-14.43,0) 2(14.43,0)
  silkscreen extent -25,-27 25,27, body extent -29,-15 29,15, height 10
FP-DQA0010A-MFG [mm]
  rrect50% 0.565x0.2 smd paste+0 mask+0: 1(-0.417,1) 2(-0.417,0.5) 4(-0.417,-0.5) 5(-0.417,-1) 6(0.417,-1) 7(0.417,-0.5) 9(0.417,0.5) 10(0.417,1)
  rrect25% 0.565x0.4 smd paste-1000 mask+0: 3(-0.417,0) 8(0.417,0)
  silkscreen extent -1.37,-1.48 0.55,1.48, body extent -0.8,-1.4 0.8,1.4, height 0.25
FP-ECX-1210-MFG [mm]
  rect 0.575x1.14 smd paste+0 mask+0: 1(-0.413,0) 2(0.413,0)
  silkscreen extent -0.65,-0.95 0.65,0.95, body extent -0.8,-0.67 0.8,0.67, height 0.25
FP-EEH-D8-MFG [mm]
  rect 3.2x1.6 smd paste+0 mask+0: 1(-2.5,0) 2(2.5,0)
  silkscreen extent -4.77,-3.4 3.4,3.4, body extent -4.35,-3.65 4.35,3.65, height 0.25
FP-GRM188-0_1-e0_2_0_55-IPC_A [mil]
  rect 47.57x39.85 smd paste+0 mask+0: 1(-31.57,0) 2(31.57,0)
  silkscreen extent -55,-36 55,36, body extent -75,-40 75,40, height 10
FP-KXT331LHS-MFG [mm]
  rect 0.55x1.5 smd paste+0 mask+0: 1(-1.625,0) 2(1.625,0)
  silkscreen extent -1.65,-1.15 1.65,1.15, body extent -2,-1.25 2,1.25, height 0.25
FP-LC-8-IPC_A [mil]
  rect 97.4x24.49 smd paste+0 mask+0: 1(-95.12,75)
  rrect100% 97.4x24.49 smd paste+0 mask+0: 2(-95.12,25) 3(-95.12,-25) 4(-95.12,-75) 5(95.12,-75) 6(95.12,-25) 7(95.12,25) 8(95.12,75)
  silkscreen extent -172,-96 27,96, body extent -164,-116 164,116, height 10
FP-LC-8-IPC_C [mil]
  rect 73.78x21.34 smd paste+0 mask+0: 1(-91.18,75)
  rrect100% 73.78x21.34 smd paste+0 mask+0: 2(-91.18,25) 3(-91.18,-25) 4(-91.18,-75) 5(91.18,-75) 6(91.18,-25) 7(91.18,25) 8(91.18,75)
  silkscreen extent -156,-96 35,96, body extent -132,-100 132,100, height 10
FP-MRJ-5381-01-MFG [mm]
  rect 1.4x1.4 hole 0.9 paste-2539.97 mask+0: 1(-4.44,9.925)
  round 1.4 hole 0.9 paste-2539.97 mask+0: 2(-3.17,12.465) 3(-1.9,9.925) 4(-0.63,12.465) 5(0.64,9.925) 6(1.91,12.465) 7(3.18,9.925) 8(4.45,12.465) 9(6.53,5.925) 10(3.99,5.925) 11(-3.99,5.925) 12(-6.53,5.925)
  round 2 hole 2 unplated paste-2539.97 mask+0: ""(-5,1.925) ""(5,1.925)
  silkscreen extent -15.8,-1.3 15.38,13.62, body extent -15.38,-13.72 15.38,13.72, height 0.25
FP-OS-CON-SMT-E7-MFG [mm]
  rect 4.15x1.9 smd paste+0 mask+0: 1(-3.475,0) 2(3.475,0)
  silkscreen extent -6.3,-4.25 4.25,4.25, body extent -5.8,-4.5 5.8,4.5, height 0.25
FP-QSH-030-01-F-D-A-K-TR-MFG [mm]
  rect 0.279x2.27 smd paste+0 mask+0: 1(-7.25,-2.865) 2(-7.25,2.865) 3(-6.75,-2.865) 4(-6.75,2.865) 5(-6.25,-2.865) 6(-6.25,2.865) 7(-5.75,-2.865) 8(-5.75,2.865) 9(-5.25,-2.865) 10(-5.25,2.865) 11(-4.75,-2.865) 12(-4.75,2.865) 13(-4.25,-2.865) 14(-4.25,2.865) 15(-3.75,-2.865) 16(-3.75,2.865) 17(-3.25,-2.865) 18(-3.25,2.865) 19(-2.75,-2.865) 20(-2.75,2.865) 21(-2.25,-2.865) 22(-2.25,2.865) 23(-1.75,-2.865) 24(-1.75,2.865) 25(-1.25,-2.865) 26(-1.25,2.865) 27(-0.75,-2.865) 28(-0.75,2.865) 29(-0.25,-2.865) 30(-0.25,2.865) 31(0.25,-2.865) 32(0.25,2.865) 33(0.75,-2.865) 34(0.75,2.865) 35(1.25,-2.865) 36(1.25,2.865) 37(1.75,-2.865) 38(1.75,2.865) 39(2.25,-2.865) 40(2.25,2.865) 41(2.75,-2.865) 42(2.75,2.865) 43(3.25,-2.865) 44(3.25,2.865) 45(3.75,-2.865) 46(3.75,2.865) 47(4.25,-2.865) 48(4.25,2.865) 49(4.75,-2.865) 50(4.75,2.865) 51(5.25,-2.865) 52(5.25,2.865) 53(5.75,-2.865) 54(5.75,2.865) 55(6.25,-2.865) 56(6.25,2.865) 57(6.75,-2.865) 58(6.75,2.865) 59(7.25,-2.865) 60(7.25,2.865)
  rect 2.54x0.43 smd paste+0 mask+0: P1(-8.065,0) P4(8.065,0)
  rect 4.7x0.43 smd paste+0 mask+0: P2(-3.175,0) P3(3.175,0)
  round 1.02 hole 1.02 unplated paste-2539.97 mask+0: ""(-10.065,2.67) ""(10.065,2.67)
  silkscreen extent -10.72,-4.78 10.72,3.68, body extent -10.82,-4.1 10.82,4.1, height 0.25
FP-SC-MFG [mm]
  rect 2.8x1.6 smd paste+0 mask+0: 1(-2.15,0) 2(2.15,0)
  silkscreen extent -4.22,-2.75 2.75,2.75, body extent -3.8,-3 3.8,3, height 0.25
FP-SMC-MFG [mm]
  rect 2.5x3.3 smd paste+0 mask+0: 1(-3.45,0) 2(3.45,0)
  silkscreen extent -4.25,-3.11 3.55,3.11, body extent -4.8,-3.21 4.8,3.21, height 0.25
FP-SOD-123-IPC_A [mm]
  rect 1.308x0.762 smd paste+0 mask+0: 1(-1.825,0)
  rrect100% 1.308x0.762 smd paste+0 mask+0: 2(1.825,0)
  silkscreen extent -2.39,-0.8 1.35,1.01, body extent -2.98,-1.3 2.98,1.3, height 0.25
FP-SOT323-3L-MFG [mm]
  rect 0.7x0.42 smd paste+0 mask+0: 1(-1,0.65) 2(-1,-0.65) 3(1,0)
  silkscreen extent -0.67,-1.1 0.67,1.1, body extent -1.45,-1.2 1.45,1.2, height 0.25
FP-SRF4532-MFG [mm]
  round 0.99 smd paste+0 mask+0: 1(-2.05,-1.25) 2(2.05,-1.25)
  round 0.97 smd paste+0 mask+0: 3(2.05,1.125) 4(-2.05,1.125)
  Top Layer region: -2.6,0.45 -2.6,1.8 -1.5,1.8 -1.5,0.95 -1.9,0.45
  Top Layer region: 1.5,1.8 2.6,1.8 2.6,0.45 1.9,0.45 1.5,0.95
  Top Layer region: 1.5,-1.8 1.5,-0.95 1.9,-0.45 2.6,-0.45 2.6,-1.8
  Top Layer region: -2.6,-1.8 -2.6,-0.45 -1.9,-0.45 -1.5,-0.95 -1.5,-1.8
  silkscreen extent -2.17,-2.47 1.12,1.7, body extent -2.7,-1.9 2.7,1.9, height 0.25
FP-SRR1260-MFG [mm]
  rect 2.9x5.4 smd paste+0 mask+0: 1(-4.85,0) 2(4.85,0)
  silkscreen extent -6.4,-6.4 6.4,6.4, body extent -6.5,-6.5 6.5,6.5, height 0.25
FP-USB5744-2G-IPC_A [mm]
  rect 1.01x0.192 smd paste+0 mask+0: 1(-3.451,2.6)
  rrect100% 1.01x0.192 smd paste+0 mask+0: 2(-3.451,2.2) 3(-3.451,1.8) 4(-3.451,1.4) 5(-3.451,1) 6(-3.451,0.6) 7(-3.451,0.2) 8(-3.451,-0.2) 9(-3.451,-0.6) 10(-3.451,-1) 11(-3.451,-1.4) 12(-3.451,-1.8) 13(-3.451,-2.2) 14(-3.451,-2.6) 29(3.451,-2.6) 30(3.451,-2.2) 31(3.451,-1.8) 32(3.451,-1.4) 33(3.451,-1) 34(3.451,-0.6) 35(3.451,-0.2) 36(3.451,0.2) 37(3.451,0.6) 38(3.451,1) 39(3.451,1.4) 40(3.451,1.8) 41(3.451,2.2) 42(3.451,2.6)
  rrect100% 0.192x1.01 smd paste+0 mask+0: 15(-2.6,-3.451) 16(-2.2,-3.451) 17(-1.8,-3.451) 18(-1.4,-3.451) 19(-1,-3.451) 20(-0.6,-3.451) 21(-0.2,-3.451) 22(0.2,-3.451) 23(0.6,-3.451) 24(1,-3.451) 25(1.4,-3.451) 26(1.8,-3.451) 27(2.2,-3.451) 28(2.6,-3.451) 43(2.6,3.451) 44(2.2,3.451) 45(1.8,3.451) 46(1.4,3.451) 47(1,3.451) 48(0.6,3.451) 49(0.2,3.451) 50(-0.2,3.451) 51(-0.6,3.451) 52(-1,3.451) 53(-1.4,3.451) 54(-1.8,3.451) 55(-2.2,3.451) 56(-2.6,3.451)
  rect 4.7x4.7 smd paste-1000 mask+0: 57(0,0)
  silkscreen extent -4.88,-3.5 3.5,3.5, body extent -4.46,-4.46 4.46,4.46, height 0.25
FP-USB5744-2G-MFG [mm]
  round 0.202 smd paste+0 mask+0: 1(-3.412,2.6) 2(-3.412,2.2) 3(-3.412,1.8) 4(-3.412,1.4) 5(-3.412,1) 6(-3.412,0.6) 7(-3.412,0.2) 8(-3.4,-0.2) 9(-3.4,-0.6) 10(-3.4,-1) 11(-3.4,-1.4) 12(-3.4,-1.8) 13(-3.4,-2.2) 14(-3.4,-2.6) 15(-2.6,-3.412) 16(-2.2,-3.412) 17(-1.8,-3.412) 18(-1.4,-3.412) 19(-1,-3.412) 20(-0.6,-3.412) 21(-0.2,-3.412) 22(0.2,-3.4) 23(0.6,-3.4) 24(1,-3.4) 25(1.4,-3.4) 26(1.8,-3.4) 27(2.2,-3.4) 28(2.6,-3.4) 29(3.412,-2.6) 30(3.412,-2.2) 31(3.412,-1.8) 32(3.412,-1.4) 33(3.412,-1) 34(3.412,-0.6) 35(3.412,-0.2) 36(3.4,0.2) 37(3.4,0.6) 38(3.4,1) 39(3.4,1.4) 40(3.4,1.8) 41(3.4,2.2) 42(3.4,2.6) 43(2.6,3.412) 44(2.2,3.412) 45(1.8,3.412) 46(1.4,3.412) 47(1,3.412) 48(0.6,3.412) 49(0.2,3.412) 50(-0.2,3.4) 51(-0.6,3.4) 52(-1,3.4) 53(-1.4,3.4) 54(-1.8,3.4) 55(-2.2,3.4) 56(-2.6,3.4)
  rect 4.6x4.6 smd paste+0 mask+0: 57(0,0)
  Top Layer region: -2.488,3.775 -2.488,3.137 -2.503,3.081 -2.544,3.04 -2.6,3.025 -2.6,3.025 -2.643,3.034 -2.68,3.058 -2.704,3.094 -2.712,3.137 -2.712,3.137 -2.712,3.775
  Top Layer region: -2.087,3.775 -2.087,3.137 -2.103,3.081 -2.144,3.04 -2.2,3.025 -2.2,3.025 -2.243,3.034 -2.28,3.058 -2.304,3.094 -2.312,3.137 -2.312,3.137 -2.312,3.775
  Top Layer region: -1.687,3.775 -1.687,3.137 -1.703,3.081 -1.744,3.04 -1.8,3.025 -1.8,3.025 -1.843,3.034 -1.88,3.058 -1.904,3.094 -1.912,3.137 -1.913,3.137 -1.913,3.775
  Top Layer region: -1.288,3.775 -1.288,3.137 -1.303,3.081 -1.344,3.04 -1.4,3.025 -1.4,3.025 -1.443,3.034 -1.48,3.058 -1.504,3.094 -1.512,3.137 -1.512,3.137 -1.512,3.775
  Top Layer region: -0.887,3.775 -0.887,3.137 -0.903,3.081 -0.944,3.04 -1,3.025 -1,3.025 -1.043,3.034 -1.08,3.058 -1.104,3.094 -1.112,3.137 -1.112,3.137 -1.112,3.775
  Top Layer region: -0.487,3.775 -0.487,3.137 -0.503,3.081 -0.544,3.04 -0.6,3.025 -0.6,3.025 -0.643,3.034 -0.68,3.058 -0.704,3.094 -0.712,3.137 -0.713,3.137 -0.713,3.775
  Top Layer region: -0.088,3.775 -0.088,3.137 -0.103,3.081 -0.144,3.04 -0.2,3.025 -0.2,3.025 -0.243,3.034 -0.28,3.058 -0.304,3.094 -0.312,3.137 -0.312,3.137 -0.312,3.775
  Top Layer region: 0.312,3.775 0.312,3.137 0.297,3.081 0.256,3.04 0.2,3.025 0.2,3.025 0.157,3.034 0.12,3.058 0.096,3.094 0.088,3.137 0.088,3.137 0.088,3.775
  Top Layer region: 0.713,3.775 0.713,3.137 0.697,3.081 0.656,3.04 0.6,3.025 0.6,3.025 0.557,3.034 0.52,3.058 0.496,3.094 0.487,3.137 0.487,3.137 0.487,3.775
  Top Layer region: 1.112,3.775 1.112,3.137 1.097,3.081 1.056,3.04 1,3.025 1,3.025 0.957,3.034 0.92,3.058 0.896,3.094 0.888,3.137 0.887,3.137 0.887,3.775
  Top Layer region: 1.512,3.775 1.512,3.137 1.497,3.081 1.456,3.04 1.4,3.025 1.4,3.025 1.357,3.034 1.32,3.058 1.296,3.094 1.288,3.137 1.288,3.137 1.288,3.775
  Top Layer region: 1.913,3.775 1.913,3.137 1.897,3.081 1.856,3.04 1.8,3.025 1.8,3.025 1.757,3.034 1.72,3.058 1.696,3.094 1.687,3.137 1.687,3.137 1.687,3.775
  Top Layer region: 2.312,3.775 2.312,3.137 2.297,3.081 2.256,3.04 2.2,3.025 2.2,3.025 2.157,3.034 2.12,3.058 2.096,3.094 2.088,3.137 2.087,3.137 2.087,3.775
  Top Layer region: 2.712,3.775 2.712,3.137 2.697,3.081 2.656,3.04 2.6,3.025 2.6,3.025 2.557,3.034 2.52,3.058 2.496,3.094 2.488,3.137 2.488,3.137 2.488,3.775
  Top Layer region: 2.488,-3.775 2.488,-3.137 2.496,-3.094 2.52,-3.058 2.557,-3.034 2.6,-3.025 2.6,-3.025 2.643,-3.034 2.68,-3.058 2.704,-3.094 2.712,-3.137 2.712,-3.137 2.712,-3.775
  Top Layer region: 2.087,-3.775 2.087,-3.137 2.096,-3.094 2.12,-3.058 2.157,-3.034 2.2,-3.025 2.2,-3.025 2.243,-3.034 2.28,-3.058 2.304,-3.094 2.312,-3.137 2.312,-3.137 2.312,-3.775
  Top Layer region: 1.687,-3.775 1.687,-3.137 1.696,-3.094 1.72,-3.058 1.757,-3.034 1.8,-3.025 1.8,-3.025 1.843,-3.034 1.88,-3.058 1.904,-3.094 1.912,-3.137 1.913,-3.137 1.913,-3.775
  Top Layer region: 1.288,-3.775 1.288,-3.137 1.296,-3.094 1.32,-3.058 1.357,-3.034 1.4,-3.025 1.4,-3.025 1.443,-3.034 1.48,-3.058 1.504,-3.094 1.512,-3.137 1.512,-3.137 1.512,-3.775
  Top Layer region: 0.887,-3.775 0.887,-3.137 0.896,-3.094 0.92,-3.058 0.957,-3.034 1,-3.025 1,-3.025 1.043,-3.034 1.08,-3.058 1.104,-3.094 1.112,-3.137 1.112,-3.137 1.112,-3.775
  Top Layer region: 0.487,-3.775 0.487,-3.137 0.496,-3.094 0.52,-3.058 0.557,-3.034 0.6,-3.025 0.6,-3.025 0.643,-3.034 0.68,-3.058 0.704,-3.094 0.712,-3.137 0.713,-3.137 0.713,-3.775
  Top Layer region: 0.088,-3.775 0.088,-3.137 0.096,-3.094 0.12,-3.058 0.157,-3.034 0.2,-3.025 0.2,-3.025 0.243,-3.034 0.28,-3.058 0.304,-3.094 0.312,-3.137 0.312,-3.137 0.312,-3.775
  Top Layer region: -0.312,-3.775 -0.312,-3.137 -0.304,-3.094 -0.28,-3.058 -0.243,-3.034 -0.2,-3.025 -0.2,-3.025 -0.157,-3.034 -0.12,-3.058 -0.096,-3.094 -0.088,-3.137 -0.088,-3.137 -0.088,-3.775
  Top Layer region: -0.713,-3.775 -0.713,-3.137 -0.704,-3.094 -0.68,-3.058 -0.643,-3.034 -0.6,-3.025 -0.6,-3.025 -0.557,-3.034 -0.52,-3.058 -0.496,-3.094 -0.487,-3.137 -0.487,-3.137 -0.487,-3.775
  Top Layer region: -1.112,-3.775 -1.112,-3.137 -1.104,-3.094 -1.08,-3.058 -1.043,-3.034 -1,-3.025 -1,-3.025 -0.957,-3.034 -0.92,-3.058 -0.896,-3.094 -0.888,-3.137 -0.887,-3.137 -0.887,-3.775
  Top Layer region: -1.512,-3.775 -1.512,-3.137 -1.504,-3.094 -1.48,-3.058 -1.443,-3.034 -1.4,-3.025 -1.4,-3.025 -1.357,-3.034 -1.32,-3.058 -1.296,-3.094 -1.288,-3.137 -1.288,-3.137 -1.288,-3.775
  Top Layer region: -1.913,-3.775 -1.913,-3.137 -1.904,-3.094 -1.88,-3.058 -1.843,-3.034 -1.8,-3.025 -1.8,-3.025 -1.757,-3.034 -1.72,-3.058 -1.696,-3.094 -1.687,-3.137 -1.687,-3.137 -1.687,-3.775
  Top Layer region: -2.312,-3.775 -2.312,-3.137 -2.304,-3.094 -2.28,-3.058 -2.243,-3.034 -2.2,-3.025 -2.2,-3.025 -2.157,-3.034 -2.12,-3.058 -2.096,-3.094 -2.088,-3.137 -2.087,-3.137 -2.087,-3.775
  Top Layer region: -2.712,-3.775 -2.712,-3.137 -2.704,-3.094 -2.68,-3.058 -2.643,-3.034 -2.6,-3.025 -2.6,-3.025 -2.557,-3.034 -2.52,-3.058 -2.496,-3.094 -2.488,-3.137 -2.488,-3.137 -2.488,-3.775
  Top Layer region: 3.775,2.488 3.137,2.488 3.094,2.496 3.058,2.52 3.034,2.557 3.025,2.6 3.025,2.6 3.034,2.643 3.058,2.68 3.094,2.704 3.137,2.712 3.137,2.712 3.775,2.712
  Top Layer region: 3.775,2.087 3.137,2.087 3.094,2.096 3.058,2.12 3.034,2.157 3.025,2.2 3.025,2.2 3.034,2.243 3.058,2.28 3.094,2.304 3.137,2.312 3.137,2.312 3.775,2.312
  Top Layer region: 3.775,1.687 3.137,1.687 3.094,1.696 3.058,1.72 3.034,1.757 3.025,1.8 3.025,1.8 3.034,1.843 3.058,1.88 3.094,1.904 3.137,1.912 3.137,1.913 3.775,1.913
  Top Layer region: 3.775,1.288 3.137,1.288 3.094,1.296 3.058,1.32 3.034,1.357 3.025,1.4 3.025,1.4 3.034,1.443 3.058,1.48 3.094,1.504 3.137,1.512 3.137,1.512 3.775,1.512
  Top Layer region: 3.775,0.887 3.137,0.887 3.094,0.896 3.058,0.92 3.034,0.957 3.025,1 3.025,1 3.034,1.043 3.058,1.08 3.094,1.104 3.137,1.112 3.137,1.112 3.775,1.112
  Top Layer region: 3.775,0.487 3.137,0.487 3.094,0.496 3.058,0.52 3.034,0.557 3.025,0.6 3.025,0.6 3.034,0.643 3.058,0.68 3.094,0.704 3.137,0.712 3.137,0.713 3.775,0.713
  Top Layer region: 3.775,0.088 3.137,0.088 3.094,0.096 3.058,0.12 3.034,0.157 3.025,0.2 3.025,0.2 3.034,0.243 3.058,0.28 3.094,0.304 3.137,0.312 3.137,0.312 3.775,0.312
  Top Layer region: 3.775,-0.312 3.137,-0.312 3.094,-0.304 3.058,-0.28 3.034,-0.243 3.025,-0.2 3.025,-0.2 3.034,-0.157 3.058,-0.12 3.094,-0.096 3.137,-0.088 3.137,-0.088 3.775,-0.088
  Top Layer region: 3.775,-0.713 3.137,-0.713 3.094,-0.704 3.058,-0.68 3.034,-0.643 3.025,-0.6 3.025,-0.6 3.034,-0.557 3.058,-0.52 3.094,-0.496 3.137,-0.487 3.137,-0.487 3.775,-0.487
  Top Layer region: 3.775,-1.112 3.137,-1.112 3.094,-1.104 3.058,-1.08 3.034,-1.043 3.025,-1 3.025,-1 3.034,-0.957 3.058,-0.92 3.094,-0.896 3.137,-0.888 3.137,-0.887 3.775,-0.887
  Top Layer region: 3.775,-1.512 3.137,-1.512 3.094,-1.504 3.058,-1.48 3.034,-1.443 3.025,-1.4 3.025,-1.4 3.034,-1.357 3.058,-1.32 3.094,-1.296 3.137,-1.288 3.137,-1.288 3.775,-1.288
  Top Layer region: 3.775,-1.913 3.137,-1.913 3.094,-1.904 3.058,-1.88 3.034,-1.843 3.025,-1.8 3.025,-1.8 3.034,-1.757 3.058,-1.72 3.094,-1.696 3.137,-1.687 3.137,-1.687 3.775,-1.687
  Top Layer region: 3.775,-2.312 3.137,-2.312 3.094,-2.304 3.058,-2.28 3.034,-2.243 3.025,-2.2 3.025,-2.2 3.034,-2.157 3.058,-2.12 3.094,-2.096 3.137,-2.088 3.137,-2.087 3.775,-2.087
  Top Layer region: 3.775,-2.712 3.137,-2.712 3.094,-2.704 3.058,-2.68 3.034,-2.643 3.025,-2.6 3.025,-2.6 3.034,-2.557 3.058,-2.52 3.094,-2.496 3.137,-2.488 3.137,-2.488 3.775,-2.488
  Top Layer region: -3.775,-2.488 -3.137,-2.488 -3.094,-2.496 -3.058,-2.52 -3.034,-2.557 -3.025,-2.6 -3.025,-2.6 -3.04,-2.656 -3.081,-2.697 -3.137,-2.712 -3.137,-2.712 -3.775,-2.712
  Top Layer region: -3.775,-2.087 -3.137,-2.087 -3.094,-2.096 -3.058,-2.12 -3.034,-2.157 -3.025,-2.2 -3.025,-2.2 -3.04,-2.256 -3.081,-2.297 -3.137,-2.312 -3.137,-2.312 -3.775,-2.312
  Top Layer region: -3.775,-1.687 -3.137,-1.687 -3.094,-1.696 -3.058,-1.72 -3.034,-1.757 -3.025,-1.8 -3.025,-1.8 -3.04,-1.856 -3.081,-1.897 -3.137,-1.912 -3.137,-1.913 -3.775,-1.913
  Top Layer region: -3.775,-1.288 -3.137,-1.288 -3.094,-1.296 -3.058,-1.32 -3.034,-1.357 -3.025,-1.4 -3.025,-1.4 -3.04,-1.456 -3.081,-1.497 -3.137,-1.512 -3.137,-1.512 -3.775,-1.512
  Top Layer region: -3.775,-0.887 -3.137,-0.887 -3.094,-0.896 -3.058,-0.92 -3.034,-0.957 -3.025,-1 -3.025,-1 -3.04,-1.056 -3.081,-1.097 -3.137,-1.112 -3.137,-1.112 -3.775,-1.112
  Top Layer region: -3.775,-0.487 -3.137,-0.487 -3.094,-0.496 -3.058,-0.52 -3.034,-0.557 -3.025,-0.6 -3.025,-0.6 -3.04,-0.656 -3.081,-0.697 -3.137,-0.712 -3.137,-0.713 -3.775,-0.713
  Top Layer region: -3.775,-0.088 -3.137,-0.088 -3.094,-0.096 -3.058,-0.12 -3.034,-0.157 -3.025,-0.2 -3.025,-0.2 -3.04,-0.256 -3.081,-0.297 -3.137,-0.312 -3.137,-0.312 -3.775,-0.312
  Top Layer region: -3.775,0.312 -3.137,0.312 -3.094,0.304 -3.058,0.28 -3.034,0.243 -3.025,0.2 -3.025,0.2 -3.04,0.144 -3.081,0.103 -3.137,0.088 -3.137,0.088 -3.775,0.088
  Top Layer region: -3.775,0.713 -3.137,0.713 -3.094,0.704 -3.058,0.68 -3.034,0.643 -3.025,0.6 -3.025,0.6 -3.04,0.544 -3.081,0.503 -3.137,0.487 -3.137,0.487 -3.775,0.487
  Top Layer region: -3.775,1.112 -3.137,1.112 -3.094,1.104 -3.058,1.08 -3.034,1.043 -3.025,1 -3.025,1 -3.04,0.944 -3.081,0.903 -3.137,0.888 -3.137,0.887 -3.775,0.887
  Top Layer region: -3.775,1.512 -3.137,1.512 -3.094,1.504 -3.058,1.48 -3.034,1.443 -3.025,1.4 -3.025,1.4 -3.04,1.344 -3.081,1.303 -3.137,1.288 -3.137,1.288 -3.775,1.288
  Top Layer region: -3.775,1.913 -3.137,1.913 -3.094,1.904 -3.058,1.88 -3.034,1.843 -3.025,1.8 -3.025,1.8 -3.04,1.744 -3.081,1.703 -3.137,1.687 -3.137,1.687 -3.775,1.687
  Top Layer region: -3.775,2.312 -3.137,2.312 -3.094,2.304 -3.058,2.28 -3.034,2.243 -3.025,2.2 -3.025,2.2 -3.04,2.144 -3.081,2.103 -3.137,2.088 -3.137,2.087 -3.775,2.087
  Top Layer region: -3.775,2.712 -3.137,2.712 -3.094,2.704 -3.058,2.68 -3.034,2.643 -3.025,2.6 -3.025,2.6 -3.04,2.544 -3.081,2.503 -3.137,2.488 -3.137,2.488 -3.775,2.488
  silkscreen extent -4.45,-3.55 3.55,3.55, body extent -3.88,-3.88 3.88,3.88, height 0.25
FTSH-105-01-F-D-RA-K-Footprint-1 [mm]
  rect 1.06x1.06 hole 0.71: 01(2.54,0)
  round 1.06 hole 0.71: 02(2.54,-1.27) 03(1.27,0) 04(1.27,-1.27) 05(0,0) 06(0,-1.27) 07(-1.27,0) 08(-1.27,-1.27) 09(-2.54,0) 10(-2.54,-1.27)
  silkscreen extent -3.14,-0.1 3.88,3.78, body extent -3.14,-1.54 3.14,6.92, height 5.04
KEMT-520-B-2_M [mm] "Molded Capacitor, 2-Leads, Body 3.7x3mm, IPC Low Density"
  rect 2.35x2.35 smd: 1(-1.475,0) 2(1.475,0)
  silkscreen extent -2.62,-1.5 1.85,1.85, body extent -1.85,-1.5 1.85,1.5, height 2.11
KTW0007B_M [mm] "DPAK, 7-Leads, Body 9.4x10.4mm, Pitch 1.27mm, IPC Low Density"
  rrect10% 3.8x1 smd: 1(-6.35,3.81) 2(-6.35,2.54) 3(-6.35,1.27) 4(-6.35,0) 5(-6.35,-1.27) 6(-6.35,-2.54) 7(-6.35,-3.81)
  rrect1% 9.1x10.55 smd: 8(3.7,0)
  silkscreen extent -6.47,-5.2 -1.25,5.2, body extent -3.2,-5.2 6.2,5.2, height 4.65
KTW0007B_N [mm] "DPAK, 7-Leads, Body 9.4x10.4mm, Pitch 1.27mm, IPC Medium Density"
  rrect11% 3.5x0.95 smd: 1(-6.3,3.81) 2(-6.3,2.54) 3(-6.3,1.27) 4(-6.3,0) 5(-6.3,-1.27) 6(-6.3,-2.54) 7(-6.3,-3.81)
  rrect1% 8.8x10.5 smd: 8(3.65,0)
  silkscreen extent -6.42,-5.2 -1.15,5.2, body extent -3.25,-5.2 6.15,5.2, height 4.65
MTC16_L [mm] "TSOP, 16-Leads, Body 5x4.4mm, Pitch 0.65mm, IPC High Density"
  oval 1.4x0.35 smd: 1(-2.8,2.275) 2(-2.8,1.625) 3(-2.8,0.975) 4(-2.8,0.325) 5(-2.8,-0.325) 6(-2.8,-0.975) 7(-2.8,-1.625) 8(-2.8,-2.275) 9(2.8,-2.275) 10(2.8,-1.625) 11(2.8,-0.975) 12(2.8,-0.325) 13(2.8,0.325) 14(2.8,0.975) 15(2.8,1.625) 16(2.8,2.275)
  silkscreen extent -2.92,-2.55 1.7,3.12, body extent -2.25,-2.55 2.25,2.55, height 1.1
"New footprint 1" [mm]
  round 0.6 smd paste-1: 1(0,0)
ONSC-SOD-123-2-425-04_V [mm] "SOD, 2-Leads, Body 2.69x1.6mm"
  rect 0.91x1.22 smd: 1(-1.635,0) 2(1.635,0)
  silkscreen extent -1.76,-0.8 0.78,1.28, body extent -1.35,-0.8 1.35,0.8, height 1.35
R0603B [mm] "Chip Resistor, 0603, 2-Leads, Body 1.58x0.85mm, IPC Medium Density"
  rrect25% 0.8x0.95 smd: 1(-0.65,0) 2(0.65,0)
  silkscreen extent -0.2,-0.7 0.2,0.7, body extent -0.82,-0.48 0.82,0.48, height 0.5
RESC1005X40X25ML05T05 [mm] "Chip Resistor, 2-Leads, Body 1.00x0.50mm, IPC Low Density"
  rect 0.65x0.65 smd: 1(-0.5,0) 2(0.5,0)
  body extent -0.53,-0.27 0.53,0.28, height 0.4
RESC1608X55X30LL15T15 [mm] "Chip Resistor, 2-Leads, Body 1.60x0.80mm, IPC High Density"
  rect 0.7x0.85 smd: 1(-0.625,0) 2(0.625,0)
  body extent -0.87,-0.48 0.87,0.48, height 0.55
RESC1608X90X30ML15T20 [mm] "Chip Resistor, 2-Leads, Body 1.60x0.80mm, IPC Low Density"
  rect 0.95x1.05 smd: 1(-0.7,0) 2(0.7,0)
  body extent -0.88,-0.48 0.87,0.48, height 0.9
RESC1609X55X30LL15T15 [mm] "Chip Resistor, 2-Leads, Body 1.75x0.95mm, IPC High Density"
  rect 0.75x0.85 smd: 1(-0.65,0) 2(0.65,0)
  body extent -0.87,-0.48 0.87,0.48, height 0.55
RESC1609X55X30ML15T15 [mm] "Chip Resistor, 2-Leads, Body 1.75x0.95mm, IPC Low Density"
  rect 1.15x1.05 smd: 1(-0.85,0) 2(0.85,0)
  body extent -0.87,-0.48 0.87,0.48, height 0.55
SISH615ADN-T1-GE3-Footprint-1 [mm]
  rect 0.35x0.5 smd paste+0 mask+0: 1(-0.937,-1.4) 2(-0.288,-1.4) 3(0.363,-1.4) 4(1.012,-1.4)
  round 0.025 smd mask+0: 5-6-7-8(0.038,0.51)
  Top Layer region: -1.187,-0.63 -1.187,-0.215 -1.568,-0.215 -1.568,0.215 -1.187,0.215 -1.187,1.35 -1.137,1.35 -1.137,1.65 -0.737,1.65 -0.737,1.35 -0.487,1.35 -0.487,1.65 -0.088,1.65 -0.088,1.35 0.163,1.35 0.163,1.65 0.563,1.65 0.563,1.35 0.813,1.35 0.813,1.65 1.212,1.65 1.212,1.35 1.262,1.35 1.262,0.215 1.643,0.215 1.643,-0.215 1.262,-0.215 1.262,-0.63
  silkscreen extent -1.51,-2.37 1.59,-1.01, body extent -1.67,-1.75 1.74,1.75, height 0.25
SOT95P285X130-5N [mm] "SOT23, 5-Leads, Body 3,00x2,85mm, Pitch 0,95mm, IPC Medium Density"
  rect 1.05x0.6 smd: 1(-1.375,0.95) 2(-1.375,0) 3(-1.375,-0.95) 4(1.375,-0.95) 5(1.375,0.95)
  silkscreen extent -1.5,-1.55 0.45,1.92, body extent -0.85,-1.55 0.85,1.55, height 1.3
SOT-223_L [mm] "SOT223, 4-Leads, Body 6.5x3.5mm, Pitch 2.3mm, Lead Span 7mm, IPC High Density"
  rect 2.1x0.9 smd: 1(-2.85,2.3) 2(-2.85,0) 3(-2.85,-2.3)
  rect 2.1x3.2 smd: 4(2.85,0)
  silkscreen extent -2.97,-3.35 1.5,3.42, body extent -1.85,-3.35 1.85,3.35, height 1.8
SOT-223_M [mm] "SOT223, 4-Leads, Body 6.5x3.5mm, Pitch 2.3mm, Lead Span 7mm, IPC Low Density"
  rect 2.7x1 smd: 1(-2.95,2.3) 2(-2.95,0) 3(-2.95,-2.3)
  rect 2.7x3.3 smd: 4(2.95,0)
  silkscreen extent -3.07,-3.35 1.3,3.47, body extent -1.85,-3.35 1.85,3.35, height 1.8